# Altium PCB PCB-NW0101 Adaptor Rev.A.PcbDoc
Units mm, origin at the board's own origin, x right, y up, seen from the top; angles counter-clockwise.
Board outline 20 x 35 mm, 2 copper layers (Top, Bottom), stack 0.129 mm thick; 1 components, 62 nets, 75 pads, 22 vias.
Unrouted connection lines stored in the file: 167.
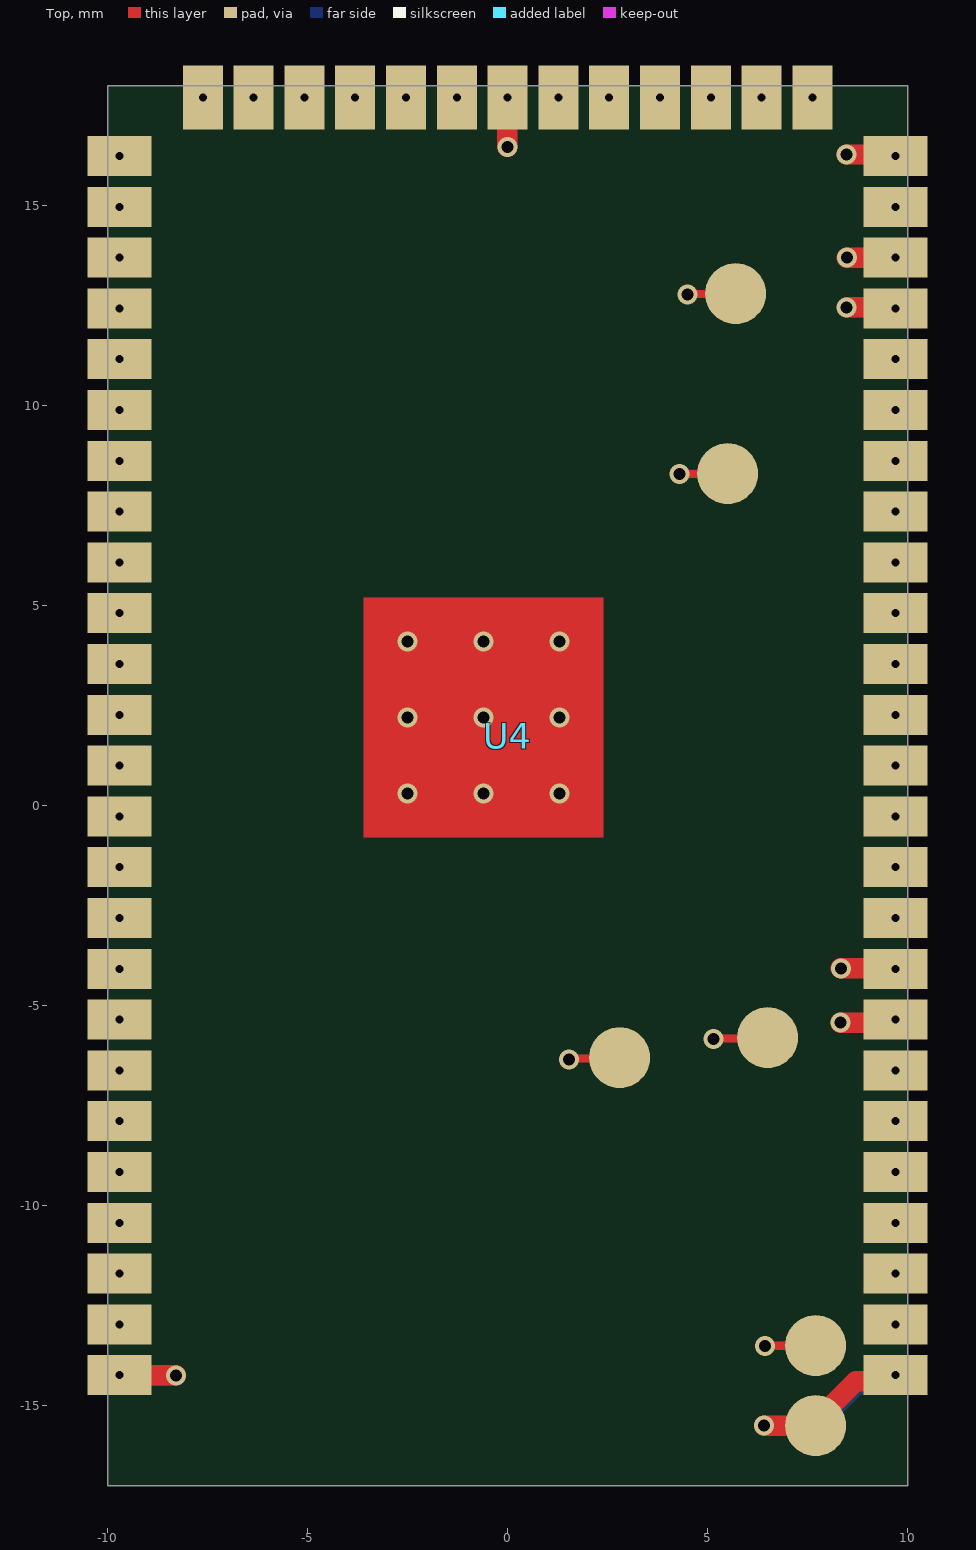
[diagram p0: Top view]
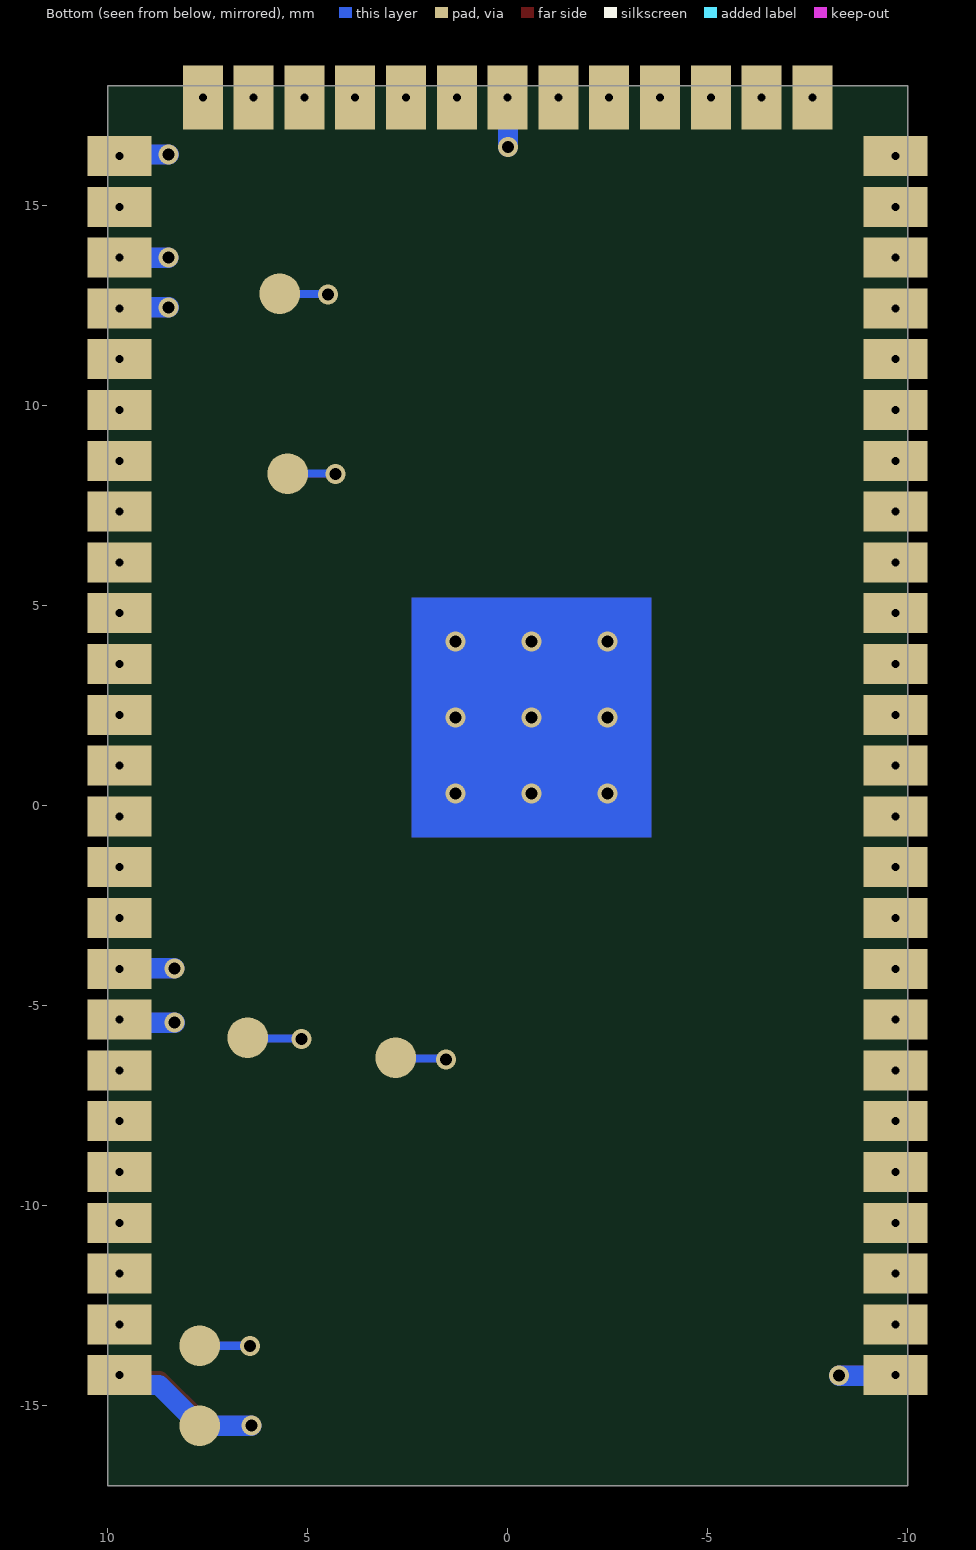
[diagram p1: Bottom view, seen from below]

## Layer stack, top to bottom
Solder Mask Top: solder mask 0.0102, Solder Resist, Dk 3.5
Top: signal copper 0.0343
Dielectric 1: dielectric 0.06, FR-4, Dk 4.3
Bottom: signal copper 0.0343
Solder Mask Bottom: solder mask 0.0102, Solder Resist, Dk 3.5

## Board outline
-10,18 10,18 10,-17 -10,-17

## Design rules (kind name [scope] priority, off if disabled: settings)
BoardOutlineClearance [All] p1: gap=0.203 ignorepadtopadclearanceinfootprint=FALSE except(0: THPad-OutlineEdge THPad-CavityEdge THPad-CutoutEdge; 0.152: Track-OutlineEdge Track-CavityEdge Track-CutoutEdge)
Clearance "Clearance - Default - DEFAULT - Net" [All] p1: gap=0.102 ignorepadtopadclearanceinfootprint=FALSE except(0.152: Via-Via)
ComponentClearance [All] p1: gap=0 collisioncheckmode=3 verticalgap=0 showdistances=FALSE
DiffPairsRouting "DiffPairsRouting - DiffPair - DDRCLK" [InDifferentialPair('DDRCLK')] p1: maxlimit=0.178 minlimit=0.127 mostfreqgap=0.178 toplayer_mingap=0.178 toplayer_minwidth=0.079 toplayer_maxwidth=0.079 toplayer_prefwidth=0.079 impedanceprofiledriven=TRUE impedanceprofileid={2A60CAE8-979D-4617-9CAD-F7D18D3C7651} impedanceprofilevalue=100.000000 maxuncoupledlength=12.7
DiffPairsRouting "DiffPairsRouting - DiffPair - ETH_R" [InDifferentialPair('ETH_R') or InDifferentialPair('ETH_T')] p2: maxlimit=0.178 minlimit=0.178 mostfreqgap=0.178 toplayer_minwidth=0.079 toplayer_maxwidth=0.079 toplayer_prefwidth=0.079 bottomlayer_minwidth=0.079 bottomlayer_maxwidth=0.079 bottomlayer_prefwidth=0.079 impedanceprofiledriven=TRUE impedanceprofileid={F7A5DDC0-C5B1-46B8-8866-6746753CC466} impedanceprofilevalue=100.000000 maxuncoupledlength=12.7
DiffPairsRouting "DiffPairsRouting - DiffPair - USB_D" [InDifferentialPair('USB')] p3: maxlimit=0.127 minlimit=0.114 mostfreqgap=0.127 toplayer_mingap=0.127 toplayer_minwidth=0.091 toplayer_maxwidth=0.091 toplayer_prefwidth=0.091 impedanceprofiledriven=TRUE impedanceprofileid={C5FCCC38-FD2C-4A72-8F5C-545B132D70D5} impedanceprofilevalue=90.000000 maxuncoupledlength=12.7
DiffPairsRouting "DiffPairsRouting - DiffPair - PCIE" [InDifferentialPair('PCIE_R') or InDifferentialPair('PCIE_T') or InDifferentialPair('PCIE_CLK')] p4: maxlimit=0.127 minlimit=0.127 mostfreqgap=0.127 toplayer_minwidth=0.104 toplayer_maxwidth=0.104 toplayer_prefwidth=0.104 bottomlayer_minwidth=0.104 bottomlayer_maxwidth=0.104 bottomlayer_prefwidth=0.104 impedanceprofiledriven=TRUE impedanceprofileid={683894AC-71DA-4711-AA13-E03A25D4E6CD} impedanceprofilevalue=85.000000 maxuncoupledlength=12.7
FabricationTestpoint [All] p1: side=3 testpointundercomponent=TRUE minsize=1.016 maxsize=1.016 preferedsize=1.016 minholesize=0 maxholesize=0 preferedholesize=0 testpointgrid=0.025 allowsidetop=TRUE allowsidebottom=TRUE usegrid=FALSE gridtolerance=0
HoleSize [All] p1: absolutevalues=TRUE maxlimit=2.54 minlimit=0 maxpercent=80.000 minpercent=20.000
HoleToHoleClearance "HoleToHoleClearance - Default - DEFAULT" [All] p1: gap=0.102 allowstackedmicrovias=TRUE
MatchedLengths [InNetClass('DDR')] p1: tolerance=2.54 checknetsindiffpair=FALSE checkdiffpairvsdiffpair=TRUE checkxsignals=TRUE checkothers=TRUE
MinimumSolderMaskSliver MinimumSolderMaskSliver_1 [OnLayer('Bottom') vs OnLayer('Bottom')] p1: minsoldermaskwidth=0.076
MinimumSolderMaskSliver [OnLayer('Top') vs OnLayer('Top')] p2: minsoldermaskwidth=0.076
PlaneClearance [All] p1: clearance=0.102
PlaneConnect "Default PlaneConnect" [All] p1: planeconnectstyle=Direct reliefexpansion=0.508 reliefentries=4 reliefconductorwidth=0.381 reliefairgap=0.254
PolygonConnect "PolygonConnect - Default Pad" [All] p1: connectstyle=Direct reliefconductorwidth=0.381 reliefentries=4 polygonreliefangle="45 Angle" airgapwidth=0.254
ReturnPath "ReturnPath - DDRCLK" [InNetClass('DDRCLK')] p1: impedanceprofileid={2A60CAE8-979D-4617-9CAD-F7D18D3C7651} _gaplimit=0
ReturnPath ReturnPath-DDR [All] p2: impedanceprofileid={722ABB41-7FFB-403E-9E2B-BB6A49F0BD66} _gaplimit=0
ReturnPath "ReturnPath - RF" [All] p3: impedanceprofileid={3401BA53-1A97-405B-B9A4-8C0F8181F371} _gaplimit=0
ReturnPath "ReturnPath - USB" [All] p4: impedanceprofileid={C5FCCC38-FD2C-4A72-8F5C-545B132D70D5} _gaplimit=0
ReturnPath "ReturnPath - PCIE" [All] p5: impedanceprofileid={683894AC-71DA-4711-AA13-E03A25D4E6CD} _gaplimit=0
ReturnPath "ReturnPath - Eth" [InNetClass('ETH')] p6: impedanceprofileid={F7A5DDC0-C5B1-46B8-8866-6746753CC466} _gaplimit=0.127
RoomDefinition INTERFACE [InComponentClass('INTERFACE')] p1: confinementstyle=ConfineIn formatcopy=TRUE lockcomponents=FALSE outline -254,-254 -203.2,-254 -203.2,-228.6 -254,-228.6
RoutingLayers "RoutingLayers - USB" [InNetClass('USB')] p1: top layer_v5=TRUE bottom layer_v5=TRUE
RoutingLayers "RoutingLayers - PCIE" [InNetClass('PCIE')] p2: top layer_v5=TRUE bottom layer_v5=TRUE
RoutingLayers "RoutingLayers - DDRCLK" [InNetClass('DDRCLK')] p3: top layer_v5=TRUE bottom layer_v5=TRUE
RoutingLayers "RoutingLayers - NetClass - RF" [InNetClass('RF')] p4: top layer_v5=TRUE bottom layer_v5=FALSE
RoutingLayers "RoutingLayers - NetClass - DDR" [InNetClass('DDR')] p5: top layer_v5=TRUE bottom layer_v5=TRUE
RoutingLayers "RoutingLayers - ETH" [InNetClass('ETH')] p6: top layer_v5=TRUE bottom layer_v5=TRUE
RoutingLayers "RoutingLayers - NetClass - Power" [InNetClass('Power')] p7: top layer_v5=TRUE bottom layer_v5=TRUE
RoutingLayers "RoutingLayers - Net - GND" [InNet('GND')] p8: top layer_v5=TRUE bottom layer_v5=FALSE
RoutingLayers "RoutingLayers - Default" [All] p9: top layer_v5=TRUE bottom layer_v5=TRUE
RoutingPriority "RoutingPriority - PCIE" [InNetClass('PCIE')] p1: routingpriority=5
RoutingPriority "RoutingPriority - USB" [InNetClass('USB')] p2: routingpriority=5
RoutingPriority "RoutingPriority - ETH" [InNetClass('ETH')] p3: routingpriority=5
RoutingPriority "RoutingPriority - DDRCLK" [InNetClass('DDRCLK')] p4: routingpriority=5
RoutingPriority "RoutingPriority - DDR" [InNetClass('DDR')] p5: routingpriority=3
RoutingPriority "RoutingPriority - Default" [All] p6: routingpriority=0
RoutingVias "RoutingVias - Default" [All] p1: holewidth=0.102 width=0.254 viastyle="Through Hole" minholewidth=0 minwidth=0.254 maxholewidth=0.102 maxwidth=1.016
SolderMaskExpansion "SolderMaskExpansion from CAM settings" [All] p1: expansion=0.051 istentingtop=FALSE
Width "Width - NetClass -RF" [InNetClass('RF')] p1: maxlimit=0.152 minlimit=0.076 preferedwidth=0.254 toplayer_prefwidth=0.092 impedanceprofiledriven=TRUE impedanceprofileid={3401BA53-1A97-405B-B9A4-8C0F8181F371} impedanceprofilevalue=50.000000 minimp=50.000000 maximp=50.000000 favimp=50.000000
Width "Width - NetClass - DDR" [InNetClass('DDR')] p2: maxlimit=0.152 minlimit=0.076 preferedwidth=0.092 toplayer_minwidth=0.092 toplayer_maxwidth=0.092 impedanceprofiledriven=TRUE impedanceprofileid={722ABB41-7FFB-403E-9E2B-BB6A49F0BD66} impedanceprofilevalue=50.000000 minimp=50.000000 maximp=50.000000 favimp=50.000000
Width "Width - Net - GND" [InNet('GND')] p3: maxlimit=0.254 minlimit=0.102 preferedwidth=0.203 minimp=50.000000 maximp=50.000000 favimp=50.000000
Width "Width - NetClass - Power" [InNetClass('Power')] p4: maxlimit=0.254 minlimit=0.102 preferedwidth=0.203 minimp=50.000000 maximp=50.000000 favimp=50.000000
Width "Width - DEFAULT" [All] p5: maxlimit=0.254 minlimit=0.076 preferedwidth=0.102 minimp=50.000000 maximp=50.000000 favimp=50.000000
20 further rules are at their usual default settings.

## Components (designator, comment, footprint, x,y, rotation, side; value= is the part's Value field where it differs from the comment)
U4 "OMEGA2S-PCB" OMEGA2S+PCB 0,6.08 r0 top locked

## Footprints (in the part's own frame and the unit in brackets; to place one, negate y for a bottom-side part, rotate by r counter-clockwise, add the part's x,y. Pads: shape width x height; smd on the part's side, far side on the other; paste and mask are expansions set on the pad)
OMEGA2S+PCB [mm]
  rect 1x1.6 hole 0.2: A1(7.62,11.62) A2(6.35,11.62) A3(5.08,11.62) A4(3.81,11.62) A5(2.54,11.62) A6(1.27,11.62) A7(0,11.62) A8(-1.27,11.62) A9(-2.54,11.62) A10(-3.81,11.62) A11(-5.08,11.62) A12(-6.35,11.62) A13(-7.62,11.62)
  rect 1.6x1 hole 0.2: B1(-9.7,10.16) B2(-9.7,8.89) B3(-9.7,7.62) B4(-9.7,6.35) B5(-9.7,5.08) B6(-9.7,3.81) B7(-9.7,2.54) B8(-9.7,1.27) B9(-9.7,0) B10(-9.7,-1.27) B11(-9.7,-2.54) B12(-9.7,-3.81) B13(-9.7,-5.08) B14(-9.7,-6.35) B15(-9.7,-7.62) B16(-9.7,-8.89) B17(-9.7,-10.16) B18(-9.7,-11.43) B19(-9.7,-12.7) B20(-9.7,-13.97) B21(-9.7,-15.24) B22(-9.7,-16.51) B23(-9.7,-17.78) B24(-9.7,-19.05) B25(-9.7,-20.32) C1(9.7,10.16) C2(9.7,8.89) C3(9.7,7.62) C4(9.7,6.35) C5(9.7,5.08) C6(9.7,3.81) C16(9.7,-8.89) C17(9.7,-10.16) C18(9.7,-11.43) C19(9.7,-12.7) C20(9.7,-13.97) C21(9.7,-15.24) C22(9.7,-16.51) C23(9.7,-17.78) C24(9.7,-19.05) C25(9.7,-20.32)
  rect 1.6x1 hole 0.2 mask+0.025: C7(9.7,2.54) C8(9.7,1.27) C9(9.7,0) C10(9.7,-1.27) C11(9.7,-2.54) C12(9.7,-3.81) C13(9.7,-5.08) C14(9.7,-6.35) C15(9.7,-7.62)

## Part data
U4: "RX TXRX MODULE WIFI U.FL SMD", Manufacturer="Onion Corporation", Part Number=OM-O2S, Geometry.Height=0mm, PCB DECAL=OMEGA2S+PCB, Prefered Vender=Digikey, Revision=A, Type="Electronic OEM Component"

## Free pads (board coordinates)
  round 1.016 smd far side paste-0.762: 2(7.7,-15.5) 3(6.5,-5.8) 4(7.7,-13.5) 5(5.7,12.8) 6(2.8,-6.3) 7(5.5,8.3)
  round 1.524 smd: 8(5.7,12.8) 9(5.5,8.3) 10(6.5,-5.8) 11(2.8,-6.3) 12(7.7,-13.5) 13(7.7,-15.5)

## Via types
v1: diameter 0.5, hole 0.3, Top to Bottom, tented both sides, 13 vias
v2: diameter 0.5, hole 0.3, Top to Bottom, 9 vias

## Nets (pads, with @x,y where several pads share a name; then routed paths per layer and width w, separated by ;. In a path a pad name is that pad's centre, name@x,y a point inside that pad or via, vN(x,y) a via of type N, cw(c..) or ccw(c..) an arc to the next point about the centre after c; other vN are vias at no path point)
1V2: pad.3 pad.10 | length 2.7
  Top w0.203: v1(5.149,-5.836) 5.167,-5.818 6.482,-5.818 pad.10
  Bottom w0.203: v1(5.149,-5.836) 5.167,-5.818 6.482,-5.818 pad.3
1V8: pad.4 pad.12 | length 2.5
  Top w0.203: v1(6.437,-13.504) 6.439,-13.502 7.698,-13.502 pad.12
  Bottom w0.203: v1(6.437,-13.504) 6.439,-13.502 7.698,-13.502 pad.4
3V3: pad.5 pad.8 U4.C17 U4.C18 | length 7.9
  Top w0.203: v1(4.495,12.784) 4.503,12.792 pad.8@5.692,12.792
  Top w0.254: pad.8@5.692,12.792 pad.8@5.708,12.792 ; v1(8.323,-5.426) v1@8.328,-5.422 ; v1@8.328,-4.072 v1(8.332,-4.068) ; U4.C18@9.624,-5.426 U4.C18
  Top w0.508: v1(8.323,-5.426) U4.C18@9.624,-5.426 ; v1(8.332,-4.068) U4.C17@9.688,-4.068
  Bottom w0.203: v1(4.495,12.784) 4.503,12.792 5.692,12.792 pad.5
  Bottom w0.508: v1(8.323,-5.426) U4.C18@9.624,-5.426 ; v1(8.332,-4.068) U4.C17@9.688,-4.068
ANT_OUT: U4.C2
CLKOUT: pad.7 pad.9 | length 2.4
  Top w0.203: v1(4.299,8.289) 4.305,8.295 5.495,8.295 pad.9
  Bottom w0.203: v1@4.316,8.306 4.322,8.3 pad.7
DDR_VREF: pad.6 pad.11 | length 2.6
  Top w0.203: v1(1.536,-6.345) 1.559,-6.323 2.777,-6.323 pad.11
  Bottom w0.203: v1(1.536,-6.345) 1.559,-6.323 2.777,-6.323 pad.6
ETH_RN: U4.B4
ETH_RP: U4.B3
ETH_TN: U4.B6
ETH_TP: U4.B5
GND: pad.2 pad.13 U4.B25 U4.C1 U4.C3 U4.C4 U4.C25 | length 17.8
  Top w0.203: v1(6.408,-15.503) v1(6.408,-15.503) ; pad.13@7.699,-15.501 pad.13 pad.13@7.7,-15.396 ; U4.C25@9.551,-14.389 U4.C25
  Top w0.254: v1@-8.299,-14.24 v1(-8.289,-14.25)
  Top w0.508: U4.B25 v1@-8.299,-14.24 ; v1(6.408,-15.503) pad.13@7.699,-15.501 ; pad.13@7.7,-15.396 8.707,-14.389 U4.C25@9.551,-14.389 ; v1(8.474,16.276) U4.C1@9.664,16.276 ; v1(8.48,13.699) U4.C3@9.699,13.699 ; v1@8.488,12.456 U4.C4@9.674,12.456
  Bottom w0.203: v1(6.408,-15.503) v1(6.408,-15.503) ; pad.2@7.699,-15.501 pad.2 ; U4.C25@9.454,-14.486 U4.C25
  Bottom w0.254: U4.C1@9.664,16.276 U4.C1 ; U4.C4@9.674,12.456 U4.C4
  Bottom w0.508: U4.B25@-9.69,-14.25 v1(-8.289,-14.25) ; v1(6.408,-15.503) pad.2@7.699,-15.501 ; pad.2 8.714,-14.486 U4.C25@9.454,-14.486 ; v1(8.474,12.456) U4.C4@9.674,12.456 ; v1(8.474,16.276) U4.C1@9.664,16.276 ; v1(8.48,13.699) U4.C3@9.699,13.699
  other v2: -2.5,0.3 -0.6,0.3 1.3,0.3 -2.5,2.2 -0.6,2.2 1.3,2.2 -2.5,4.1 -0.6,4.1 1.3,4.1
I2C_SCL: U4.A5
I2C_SDA: U4.A6
I2S_CLK: U4.A4
I2S_SDI: U4.A1
I2S_SDO: U4.A2
I2S_WS: U4.A3
IO11: U4.A13
IO14: U4.B7
IO15: U4.B8
IO16: U4.B9
IO17: U4.B10
IO38: U4.C22
IO44: U4.C7
JTAG_TCK: U4.C19
JTAG_TDI: U4.C9
JTAG_TDO: U4.C8
JTAG_TMS: U4.C10
JTAG_TRST: U4.C20
PCIE_CKN: U4.C12
PCIE_CKP: U4.C11
PCIE_RXN: U4.C13
PCIE_RXP: U4.C14
PCIE_TXN: U4.C16
PCIE_TXP: U4.C15
PERST_N: U4.C24
PORST_N: U4.C21
PWM0: U4.B11
PWM1: U4.B12
REF_CLKO: U4.C23
RXD0: U4.B2
RXD1: U4.C5
RXD2: U4.B14
SD_CD: U4.B16
SD_CLK: U4.B19
SD_CMD: U4.B20
SD_D0: U4.B18
SD_D1: U4.B17
SD_D2: U4.B22
SD_D3: U4.B21
SD_WP: U4.B15
SPI_CLK: U4.A9
SPI_CS0: U4.A12
SPI_CS1: U4.A8
SPI_MISO: U4.A10
SPI_MOSI: U4.A11
TXD0: U4.B1
TXD1: U4.C6
TXD2: U4.B13
USB_D+: U4.B23
USB_D-: U4.B24
VDD_FLASH: U4.A7 | length 2.5
  Top w0.254: U4.A7@-0.008,17.692 U4.A7
  Top w0.508: v1(-0.008,16.467) U4.A7@-0.008,17.692
  Bottom w0.508: v1(-0.008,16.467) U4.A7@-0.008,17.692

## Other copper
Top:
  rectangle net GND: -3.6,-0.8 2.4,5.2
Bottom:
  rectangle net GND: -3.6,-0.8 2.4,5.2

## Silkscreen, mask and mechanical layers (free items; w line width, h text height)
Solder Mask Bottom:
  region: 2.413,5.207 2.413,-0.864 2.362,-0.813 -3.607,-0.813 -3.607,5.207
Shield Drawing:
  lines w0.254: 5.1,17 5.1,12.55 9.1,12.55 9.1,-16.6 -9.1,-16.6 -9.1,17 5.107,17
Outline:
  lines w0: -10,-17 -10,18 10,18 10,-17 -10,-17
  lines w1.2: -10,-17 -10,18 10,18 10,-17 -10,-17
Drill Drawing:
  lines w0.025: -5.1,0 -5.099,0 ; 0,-7.5 0.001,-7.5 ; 0.6,3.1 0.601,3.1 ; 0,7.5 0.001,7.5 0,7.5 ; 5.1,0 5.101,0

## Dimensions
7.62,17.7 to 5.743,17.001 on Drill Drawing
2.8,-6.3 to 10,-17 on Drill Drawing
-10,-17 to 2.8,-6.3 on Drill Drawing
10,-17 to 9,-9.786 on Drill Drawing
-10,-17 to -9,-9.801 on Drill Drawing
6.5,-5.8 to 10,-17 on Drill Drawing
7.7,-13.5 to 10,-17 on Drill Drawing
5.7,12.8 to 10,18 on Drill Drawing
5.5,8.3 to 10,18 on Drill Drawing
-10,18 to 5.5,8.3 on Drill Drawing
-10,18 to 5.7,12.8 on Drill Drawing
-10,-17 to 6.5,-5.8 on Drill Drawing
-10,-17 to 7.7,-13.5 on Drill Drawing
-10,-17 to 7.7,-15.5 on Drill Drawing
10.98,14.446 to 11.378,12.55 on Shield Drawing
9.371,10.551 to 9.273,-3.353 on Shield Drawing
-9.1,-14.75 to 9.1,-14.25 on Shield Drawing
9.1,11.55 to -9.1,15.3 on Shield Drawing
5.1,15.8 to 9.1,11.55 on Shield Drawing
1.253,17.226 to 5.1,15.8 on Shield Drawing
1.25,17.227 to -7.452,17.236 on Shield Drawing
-9.1,15.3 to -7.452,17.231 on Shield Drawing
-6.055,-16.06 to 4.242,-16.203 on Shield Drawing
4.254,-16.201 to 9.1,-14.25 on Shield Drawing
-9.1,-14.75 to -6.054,-16.057 on Shield Drawing
9.26,-3.352 to 9.313,-5.848 on Shield Drawing
-9.401,-0.498 to -9.258,-12.75 on Shield Drawing
-9.258,-12.751 to -7.65,-16.6 on Shield Drawing
3.25,17 to 6.286,14.447 on Shield Drawing
9.285,-11.754 to 9.313,-5.849 on Shield Drawing
6.75,-16.6 to 9.284,-11.754 on Shield Drawing
-9.406,-0.502 to -9.356,2.502 on Shield Drawing
-9.386,13.452 to -9.352,2.5 on Shield Drawing
-8.35,17 to -9.331,13.453 on Shield Drawing
3.25,17 to 6.75,-16.6 on Shield Drawing
-8.35,17 to -7.65,-16.6 on Shield Drawing
-0.6,2.2 to -10,-17 on Drill Drawing
10,18 to 7.62,18 on Drill Drawing
-1.27,18 to 0,18 on Drill Drawing
-10,18 to -7.62,18 on Drill Drawing
-10,-7.89 to -10,-6.62 on Drill Drawing
-10,18 to -10,16.24 on Drill Drawing
-10,-17 to -10,-14.24 on Drill Drawing
-0.6,2.2 to -10,-17 on Drill Drawing
-10,18 to 10,18 on Drill Drawing
10,18 to 10,-17 on Drill Drawing